# EAGLE board V-00716-00 (EAGLE 7.2.0)
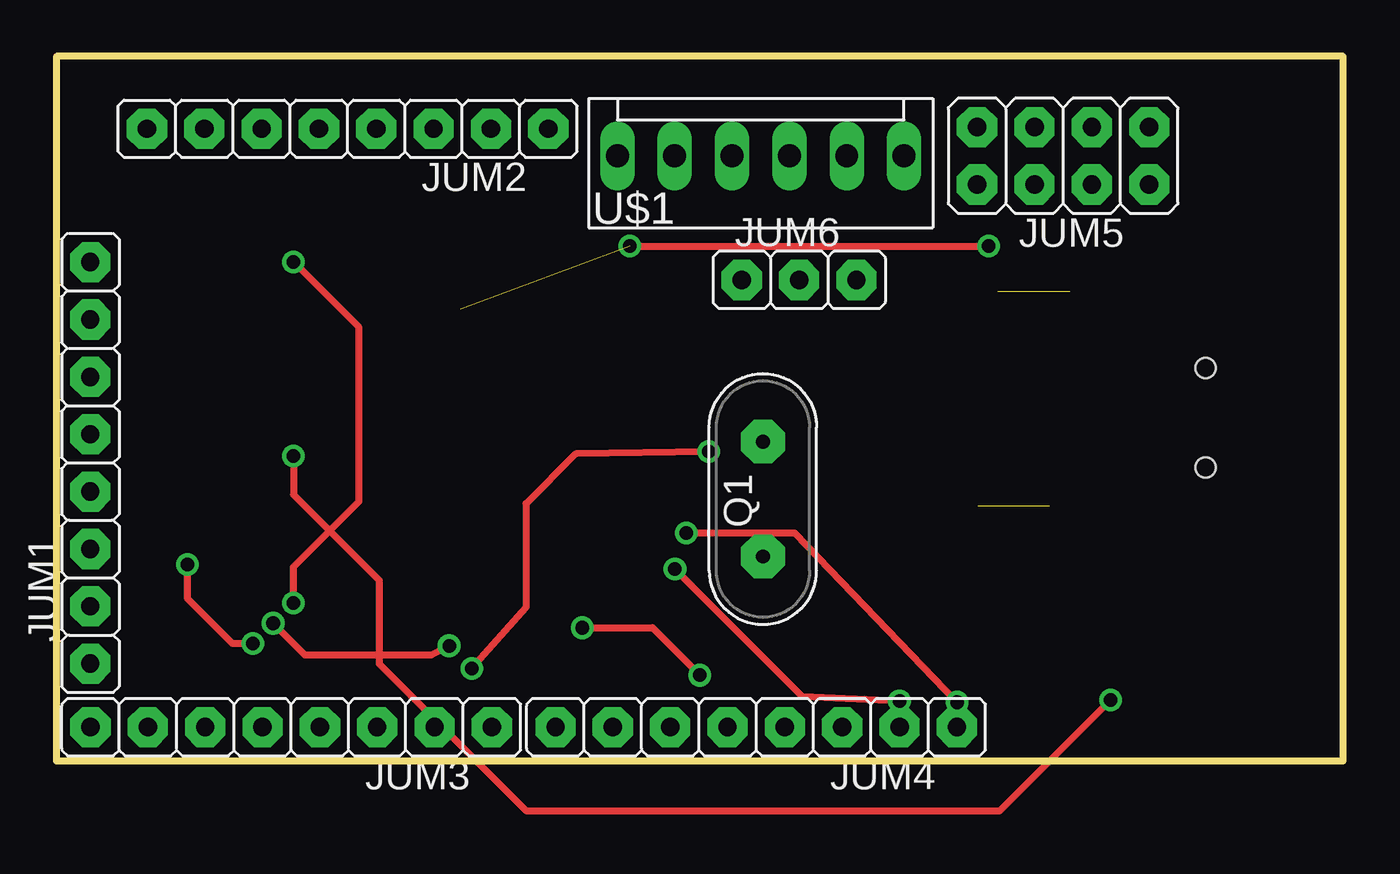
[diagram p0: board, top side]
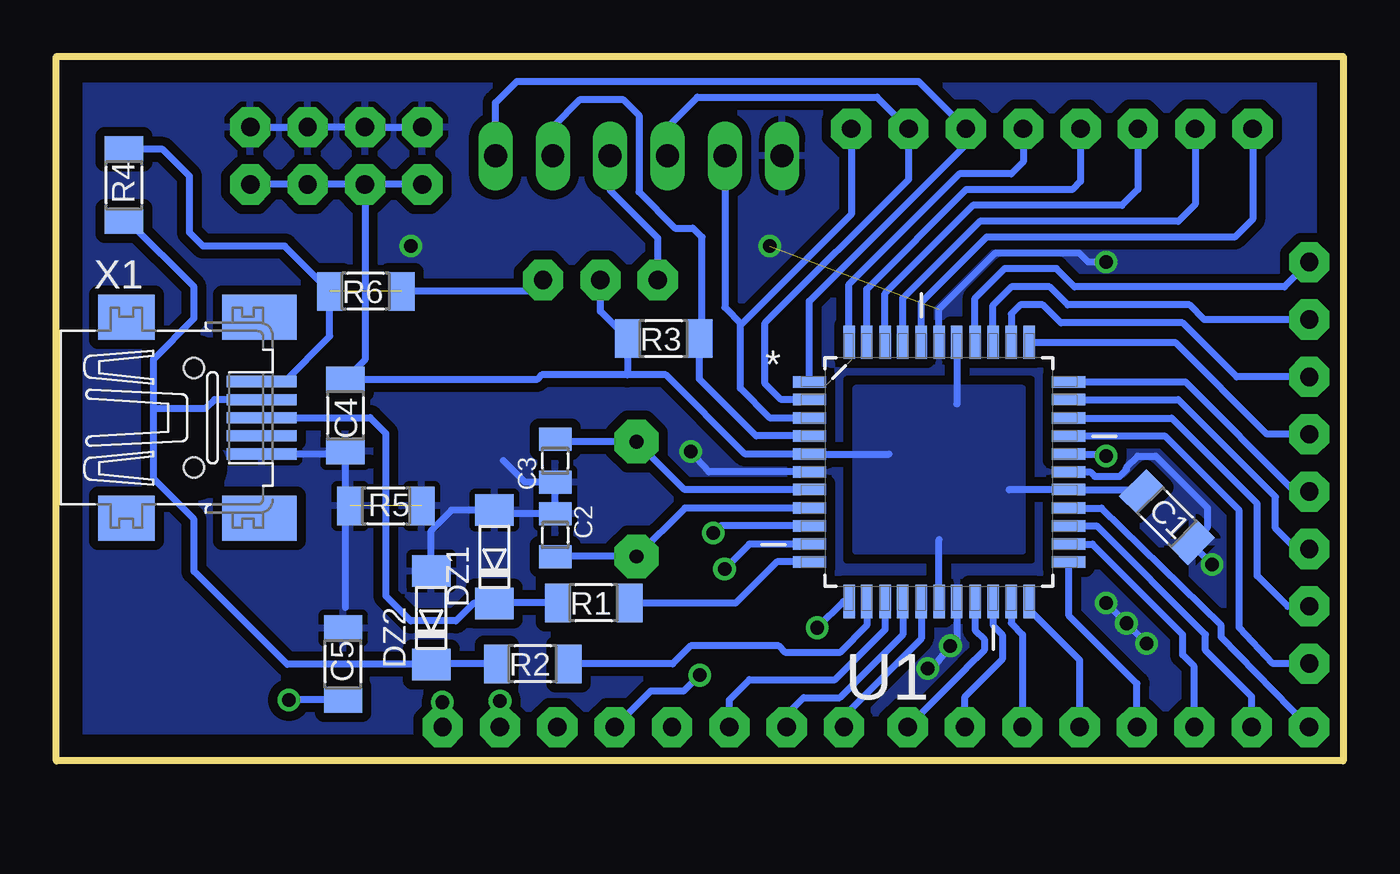
[diagram p1: board, bottom side, seen from below]

Size 57 x 31.2 mm. Coordinates in mm from the lower left corner, seen from the top.
Outline: 0,0 57,0 57,31.2 0,31.2 0,0
Copper layers (1*16): Top 0.035mm / dielectric 1.5mm / Bottom 0.035mm
Design rules "default": minimum track width 10mil, minimum drill 24mil, track to track 8mil, track to pad 8mil, pad to pad 8mil, via to via 8mil, smd to smd 8mil, copper to edge 40mil, drill to drill 8mil, minimum pad ring 10mil, minimum via ring 8mil, stop-mask expansion 4mil, vias tented up to drill 0mil, thermal gap 10mil

## Footprints (pad centres in the part's own frame; a part is rotated, then mirrored left to right if it is on the bottom)
1206 = smd 1.143 x 1.702: 1 -1.587,0; 2 1.587,0
0805 = smd 1.016 x 1.422: 1 -0.953,0; 2 0.953,0
SOD-80 = smd 1.397 x 1.702: A 1.905,0; K -2.223,0
S1G8_JUM = drill 0.813 pad 1.778 octagon: 1 -8.89,0; 2 -6.35,0; 3 -3.81,0; 4 -1.27,0; 5 1.27,0; 6 3.81,0; 7 6.35,0; 8 8.89,0
S2G4_JUM = drill 0.813 pad 1.778 octagon: 1_1 -3.81,-1.27; 1_2 -1.27,-1.27; 1_3 1.27,-1.27; 1_4 3.81,-1.27; 2_1 -3.81,1.27; 2_2 -1.27,1.27; 2_3 1.27,1.27; 2_4 3.81,1.27
S1G3_JUM = drill 0.813 pad 1.778 octagon: 1 -2.54,0; 2 0,0; 3 2.54,0
HC-49U = drill 0.61 pad 1.93 octagon: 1 -2.54,0; 2 2.54,0
QFP80P1200X1200X120-44N = smd 1.473 x 0.508: 1 -5.74,3.988; 2 -5.74,3.2; 3 -5.74,2.388; 4 -5.74,1.6; 5 -5.74,0.787; 6 -5.74,0; 7 -5.74,-0.787; 8 -5.74,-1.6; 9 -5.74,-2.388; 10 -5.74,-3.2; 11 -5.74,-3.988; 23 5.74,-3.988; 24 5.74,-3.2; 25 5.74,-2.388; 26 5.74,-1.6; 27 5.74,-0.787; 28 5.74,0; 29 5.74,0.787; 30 5.74,1.6; 31 5.74,2.388; 32 5.74,3.2; 33 5.74,3.988 | smd 0.508 x 1.473: 12 -3.988,-5.74; 13 -3.2,-5.74; 14 -2.388,-5.74; 15 -1.6,-5.74; 16 -0.787,-5.74; 17 0,-5.74; 18 0.787,-5.74; 19 1.6,-5.74; 20 2.388,-5.74; 21 3.2,-5.74; 22 3.988,-5.74; 34 3.988,5.74; 35 3.2,5.74; 36 2.388,5.74; 37 1.6,5.74; 38 0.787,5.74; 39 0,5.74; 40 -0.787,5.74; 41 -1.6,5.74; 42 -2.388,5.74; 43 -3.2,5.74; 44 -3.988,5.74
PSH02-06P = drill 1.016 pad 1.422 long: 1 -6.35,0; 2 -3.81,0; 3 -1.27,0; 4 1.27,0; 5 3.81,0; 6 6.35,0
32005-201 = smd 3.1 x 0.5: 1 3,1.6; 2 3,0.8; 3 3,0; 4 3,-0.8; 5 3,-1.6 | smd 2.5 x 2: M1 -3,-4.45; M2 -3,4.45 | smd 3.3 x 2: M3 2.9,4.45; M4 2.9,-4.45 | hole 0.9: 0,2.2; 0,-2.2

## Placement (x,y rotation side)
C1  100n  [1206]  7.8,10.8 315 bottom
C2  27pF  [0805]  34.9,10 270 bottom
C3  27pF  [0805]  34.9,13.3 90 bottom
C4  10uF  [1206]  44.2,15.3 270 bottom
C5  100n  [1206]  44.3,4.3 90 bottom
DZ1  3V6  [SOD-80]  37.6,9.2 90 bottom
DZ2  3V6  [SOD-80]  40.4,6.5 90 bottom
JUM1  S1G8_JUMP  [S1G8_JUM]  1.5,13.2 90 top
JUM2  S1G8_JUMP  [S1G8_JUM]  12.9,28 180 top
JUM3  S1G8_JUMP  [S1G8_JUM]  10.4,1.5 180 top
JUM4  S1G8_JUMP  [S1G8_JUM]  31,1.5 180 top
JUM5  S2G4_JUMP  [S2G4_JUM]  44.6,26.8 180 top
JUM6  S1G3_JUMP  [S1G3_JUM]  32.9,21.3 0 top
Q1  16MHz  [HC-49U]  31.3,11.6 90 top
R1  68R  [1206]  33.2,7 180 bottom
R2  68R  [1206]  35.9,4.3 180 bottom
R3  10k  [1206]  30.1,18.7 180 bottom
R4  1k5  [1206]  54,25.5 90 bottom
R5  0R  [1206]  42.4,11.3 0 bottom
R6  0R  [1206]  43.3,20.8 180 bottom
U1  ATMEGA32-16AU  [QFP80P1200X1200X120-44N]  17.9,12.8 0 bottom
U$1  AVR_PROG_SPI  [PSH02-06P]  31.2,26.8 0 top
X1  MINI-USB-32005-201  [32005-201]  50.9,15.2 0 bottom

## Library data of the parts
C1-C5 DZ1 DZ2 Q1 R1-R6 = #PaJa_31
JUM1-JUM6 U$1 = #PaJa_konektory
U1 = #_Atmel_By_element14_Batch_1-00; MPN: ATMEGA32-16AU; OC_FARNELL: 9171274; OC_NEWARK: 69K6677; PACKAGE: TQFP-44; SUPPLIER: Atmel
X1 = con-cypressindustries; OC_FARNELL: unknown; OC_NEWARK: unknown

## Nets
+5V: C1.1 C4.1 JUM5.2_1 JUM5.2_2 JUM5.2_3 JUM5.2_4 JUM6.2 R3.2 U1.5 U1.17 U1.27 U1.38
+5V_OUT: JUM6.1 U$1.4
DATA+: DZ1.K R1.2 X1.3
DATA-: DZ2.K R2.2 R4.1 X1.2
GNDINT: C1.2 C2.1 C3.1 C4.2 C5.2 DZ1.A DZ2.A JUM5.1_1 JUM5.1_2 JUM5.1_3 JUM5.1_4 R5.1 R5.2 U1.6 U1.18 U1.28 U1.39 U$1.1 X1.5
N$1: C5.1 U1.29
N$4: JUM1.1 U1.30
N$5: JUM1.2 U1.31
N$6: JUM1.3 U1.32
N$7: JUM1.4 U1.33
N$8: JUM1.5 U1.34
N$9: JUM1.6 U1.35
N$10: JUM1.7 U1.36
N$11: JUM1.8 U1.37
N$15: JUM2.4 U1.44
N$16: JUM2.5 U1.43
N$17: JUM2.6 U1.42
N$18: JUM2.7 U1.41
N$19: JUM2.8 U1.40
N$20: JUM3.1 U1.19
N$21: JUM3.2 U1.20
N$22: JUM3.3 U1.21
N$23: JUM3.4 U1.22
N$24: JUM3.5 U1.23
N$25: JUM3.6 U1.24
N$26: JUM3.7 U1.25
N$27: JUM3.8 U1.26
N.C.: X1.4
P_MISO: JUM2.2 U1.2 U$1.3
P_MOSI: JUM2.3 U1.1 U$1.6
P_SCK: JUM2.1 U1.3 U$1.2
PD0: JUM4.1 U1.9
PD1: JUM4.2 U1.10
PD2: R1.1 U1.11
PD3: JUM4.4 U1.12
PD4: R2.1 U1.13
PD5: JUM4.6 U1.14
PD6: JUM4.7 U1.15
PD7: JUM4.8 U1.16
RESET: R3.1 U1.4 U$1.5
VCCINT: JUM6.3 R4.2 R6.1 R6.2 X1.1
XTAL1: C2.2 Q1.1 U1.8
XTAL2: C3.2 Q1.2 U1.7

## Tracks (layer width: path | path; a pad name or v marks a point on that pad's centre or on a via)
+5V
  Bottom 0.305: JUM5.2_4 JUM5.2_3 | JUM5.2_3 JUM5.2_2 JUM5.2_1 | JUM5.2_3 43.33,17.76 C4.1 35.71,16.89 35.5,17.1 31.7,17.1 | 14.8,12 14.79,12.01 U1.27 9.01,12.01 C1.1 | 20.1,13.6 20.11,13.59 U1.5 26.49,13.59 30,17.1 31.7,17.1 | U1.38 17.11,15.81 17.1,15.8 | U1.17 17.9,9.8 | 31.7,17.1 31.7,18.69 R3.2 32.9,19.91 JUM6.2
  pour Bottom (rank 4): 14.2,16.5 21.6,16.5 21.6,9.3 14.2,9.3
+5V_OUT
  Bottom 0.305: U$1.4 32.47,25.27 30.36,23.16 JUM6.1
DATA+
  Bottom 0.3: X1.3 43.1,15.2 42.4,14.5 42.4,7.3 41.3,6.2 39.3,6.2 38.52,6.98 DZ1.K 37.58,7 R1.2
DATA-
  Bottom 0.3: R2.2 40.38,4.3 DZ2.K 46.78,4.28 50.9,8.4 50.9,10.7 52.7,12.5 52.7,15.5 | 52.7,15.5 52.7,17.8 50.9,19.6 50.9,21 | X1.2 50,16 50.4,15.6 52.6,15.6 52.7,15.5
  Bottom 0.305: R4.1 53.81,23.91 50.9,21
GNDINT  (via drill 0.6)  (2 unrouted)
  Top 0.3: v17.4,5.1 16.6,4.7 11,4.7 v9.6,6.1 | v28.9,13.7 23,13.6 20.8,11.4 20.8,6.8 v18.4,4.1 | v5.8,8.7 5.8,7.2 7.8,5.2 v8.7,5.2 | v10.5,7 10.5,8.6 13.4,11.5 13.4,19.2 v10.5,22.1
  Top 0.305: v25.4,22.8 v41.3,22.8
  Bottom 0.3: X1.5 44.31,13.6 C4.2 44.2,6.8 | U1.39 17.9,20 15.4,22.5 11.7,22.5 11.3,22.1 v10.5,22.1 | v5.8,8.7 6.68,9.58 C1.2 6,10.36 6,11.2 8.3,13.5 9.1,13.5 9.6,13 9.6,12.9 9.9,12.6 11,12.6 11.2,12.8 U1.28 | U1.18 17.11,5.21 v17.4,5.1 18.1,4.2 v18.4,4.1 | U1.6 28.1,12.8 v28.9,13.7 | DZ2.A 40.4,10.2 39.49,11.11 DZ1.A 37.45,10.95 C2.1 C3.1 36.25,12.35 37.2,13.3 | JUM5.1_1 JUM5.1_2 JUM5.1_3 JUM5.1_4 | v10.5,7 v9.6,6.1 v8.7,5.2
  pour Bottom (isolate 0.406, rank 6): 0,0 57,0 57.1,31.2 0.1,31.2
N$1  (via drill 0.6)
  Top 0.3: v10.5,13.5 10.5,11.8 14.3,8 14.3,4.3 20.8,-2.2 41.8,-2.2 v46.7,2.7
  Bottom 0.3: C5.1 46.69,2.71 v46.7,2.7 | U1.29 10.89,13.59 v10.5,13.5
N$4
  Bottom 0.3: U1.30 7.9,14.4 4.6,11.1 4.6,5.9 3.11,4.31 JUM1.1
N$5
  Bottom 0.3: U1.31 7.59,15.19 3.8,11.4 3.8,8.2 2.45,6.85 JUM1.2
N$6
  Bottom 0.3: U1.32 7.3,16 3,11.7 3,10.3 2.09,9.39 JUM1.3
N$7
  Bottom 0.3: U1.33 6.99,16.79 2.13,11.93 JUM1.4
N$8
  Bottom 0.3: U1.34 7.44,18.54 3.37,14.47 JUM1.5
N$9
  Bottom 0.3: JUM1.6 4.71,17.01 7.1,19.4 12.5,19.4 13.3,20.2 14.3,20.2 14.7,19.8 U1.35
N$10
  Bottom 0.3: JUM1.7 6.15,19.55 6.8,20.2 12.2,20.2 13,21 14.7,21 15.51,20.19 U1.36
N$11
  Bottom 0.3: JUM1.8 2.6,21 11.9,21 12.7,21.8 15,21.8 16.3,20.5 U1.37
N$15
  Bottom 0.3: JUM2.4 14.17,26.53 14.7,26 17,26 21.89,21.11 U1.44
N$16
  Bottom 0.3: JUM2.5 11.63,25.67 12,25.3 16.7,25.3 21.1,20.9 U1.43
N$17
  Bottom 0.3: JUM2.6 9.09,25.31 9.8,24.6 16.4,24.6 20.29,20.71 U1.42
N$18
  Bottom 0.3: JUM2.7 6.55,24.65 7.3,23.9 16.1,23.9 19.5,20.5 U1.41
N$19
  Bottom 0.3: JUM2.8 4.01,23.99 4.8,23.2 15.8,23.2 18.69,20.31 U1.40
N$20
  Bottom 0.3: U1.19 16.3,5.8 15.9,5.4 15.9,4.9 16.7,4.1 16.7,4.09 JUM3.1
N$21
  Bottom 0.3: U1.20 15.51,6.01 15.1,5.6 15.1,4.5 16.75,2.85 JUM3.2
N$22
  Bottom 0.3: U1.21 14.7,6.1 14.2,5.6 JUM3.3
N$23
  Bottom 0.3: JUM3.4 11.67,4.47 13.91,6.71 U1.22
N$24
  Bottom 0.3: U1.23 12.16,6.46 9.13,3.43 JUM3.5
N$25
  Bottom 0.3: U1.24 11.1,9.6 7.1,5.6 7.1,4.7 6.59,4.19 JUM3.6
N$26
  Bottom 0.3: U1.25 10.91,10.41 6.1,5.6 6.1,4.9 4.05,2.85 JUM3.7
N$27
  Bottom 0.3: U1.26 10.7,11.2 5.4,6 5.4,5.49 JUM3.8
P_MISO
  Bottom 0.3: JUM2.2 19.25,25.75 25.6,19.4 25.6,16.7 24.9,16 U1.2
  Bottom 0.305: U$1.3 29.93,28.07 28.6,29.4 20.65,29.4 JUM2.2
P_MOSI
  Bottom 0.3: JUM2.3 16.71,27.29 23.64,20.36 U1.1
  Bottom 0.305: U$1.6 37.55,29.15 36.6,30.1 18.81,30.1 JUM2.3
P_SCK
  Bottom 0.3: U1.3 25.39,15.19 26.7,16.5 26.7,19.3 26.65,19.35 21.79,24.21 JUM2.1
  Bottom 0.305: U$1.2 27.39,20.09 26.65,19.35
PD0  (via drill 0.6)
  Top 0.3: v27.9,10.1 32.7,10.1 v39.9,2.6
  Bottom 0.3: U1.9 27.59,10.41 v27.9,10.1 | JUM4.1
  Bottom 0.813: v39.9,2.6 JUM4.1
PD1  (via drill 0.6)
  Top 0.3: v37.35,2.65 33.05,2.85 v27.4,8.5
  Bottom 0.3: U1.10 26.3,9.6 v27.4,8.5
  Bottom 0.813: JUM4.2 v37.35,2.65
PD2
  Bottom 0.3: U1.11 25.09,8.81 26.9,7 R1.1
PD3  (via drill 0.6)
  Top 0.3: v23.3,5.9 26.4,5.9 v28.5,3.8
  Bottom 0.3: U1.12 22.14,7.06 v23.3,5.9 | v28.5,3.8 29.2,3.1 30.67,3.1 JUM4.4
PD4
  Bottom 0.3: U1.13 21.1,6 22.3,4.8 24.7,4.8 25,5.1 28.9,5.1 29.7,4.3 R2.1
PD5
  Bottom 0.3: U1.14 20.29,5.81 22.5,3.6 26.3,3.6 27.19,2.71 JUM4.6
PD6
  Bottom 0.3: U1.15 19.5,5.6 22.3,2.8 23.9,2.8 24.65,2.05 JUM4.7
PD7
  Bottom 0.3: U1.16 18.69,5.41 22.11,1.99 JUM4.8
RESET
  Bottom 0.3: U1.4 26,14.4
  Bottom 0.305: U$1.5 35.01,28.09 33.8,29.3 31.9,29.3 31.2,28.6 31.2,25.2 29.6,23.6 28.8,23.6 28.4,23.2 28.4,18.81 R3.1 28.51,16.91 26,14.4
VCCINT  (1 unrouted)
  Bottom 0.305: JUM6.3 35.94,20.8 R6.1 | X1.1 46.9,16.8 44.89,18.81 R6.2 46.89,22.8 50.5,22.8 51.1,23.4 51.1,25.9 52.29,27.09 R4.2
XTAL1
  Bottom 0.3: U1.8 29.16,11.2 Q1.1 34.89,9.06 C2.2
XTAL2
  Bottom 0.3: U1.7 29.17,12.01 Q1.2 34.79,14.14 C3.2